# Altium PCB QMKMouse.PcbDoc (part 2 of 2)
Units mm, origin at the board's own origin, x right, y up, seen from the top; angles counter-clockwise.
Board outline 104.61 x 65.75 mm, 4 copper layers (Top Layer, Plane 1, Plane 2, Bottom Layer), stack 0.78 mm thick; 110 components, 56 nets, 360 pads, 326 vias.
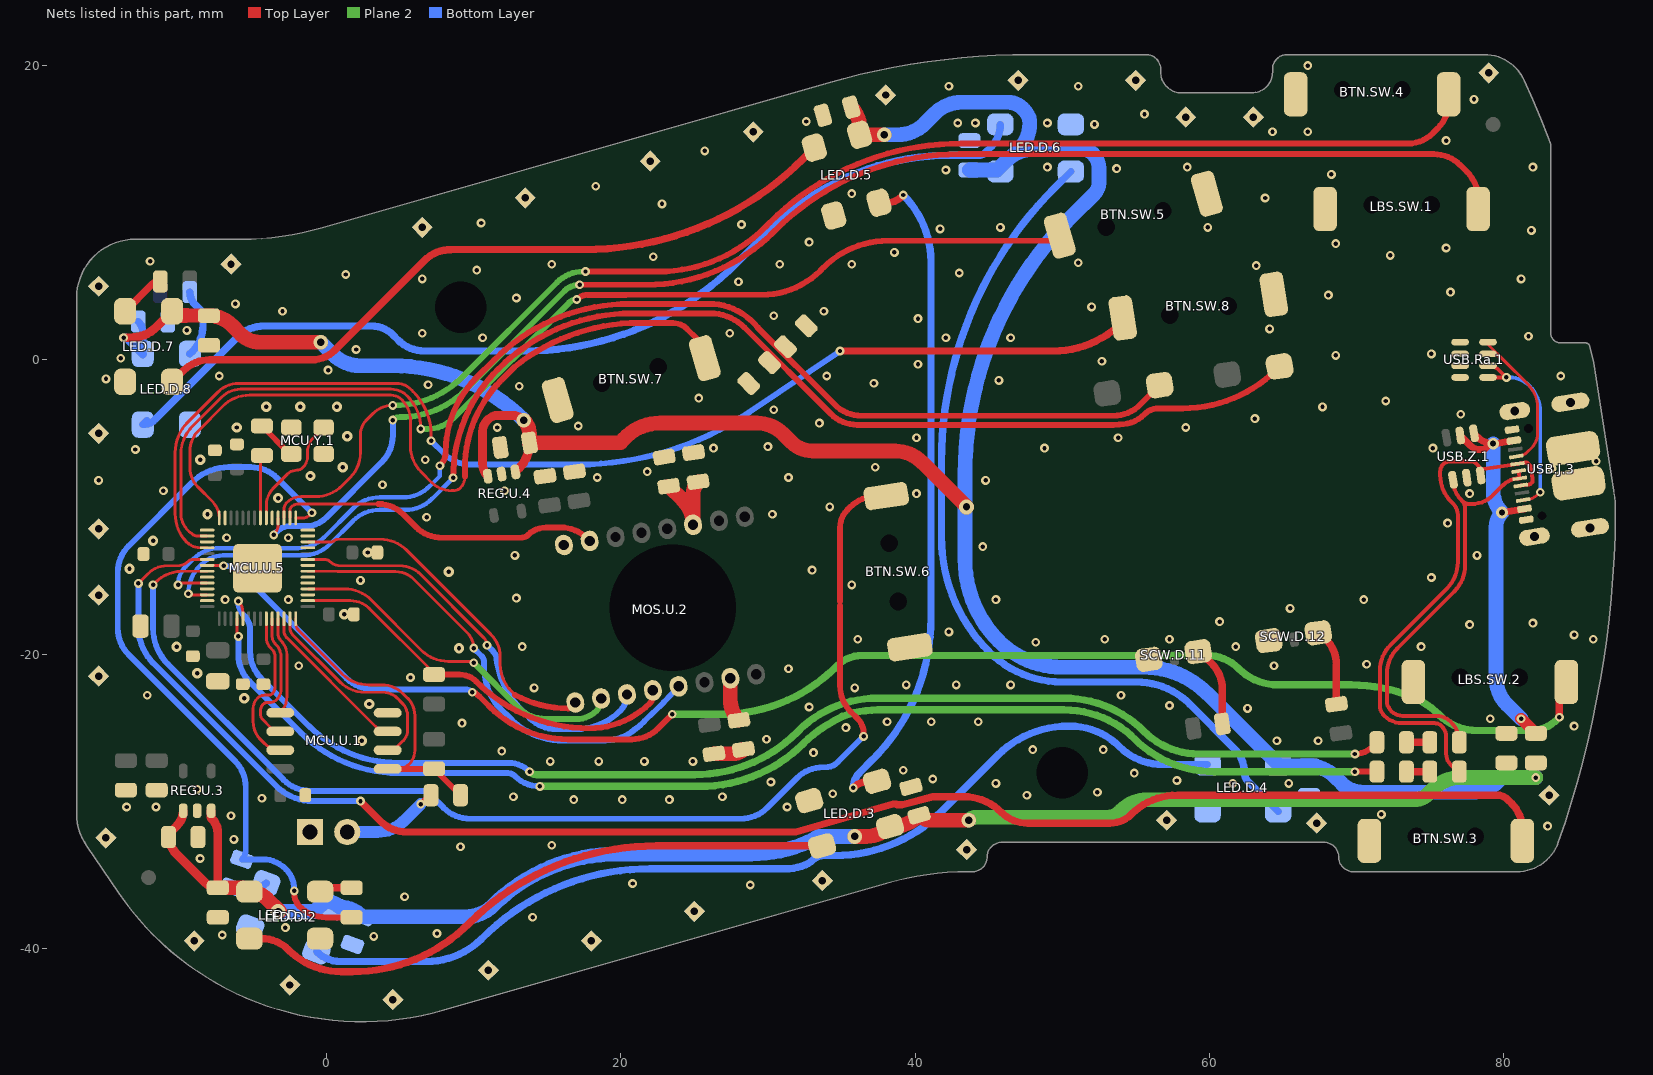
[diagram p4: the nets of this part, all layers, seen from the top]

## Via types
v1: diameter 0.6, hole 0.3, Top Layer to Bottom Layer, tented both sides, 258 vias
v2: diameter 0.7, hole 0.3, Top Layer to Bottom Layer, tented both sides, 29 vias
v3: diameter 1.016, hole 0.508, Top Layer to Bottom Layer, tented both sides, 28 vias
v4: diameter 1, hole 0.5, Top Layer to Bottom Layer, tented both sides, 9 vias
v5: diameter 0.8, hole 0.4, Top Layer to Bottom Layer, tented both sides, 2 vias

## Nets (pads, with @x,y where several pads share a name; then routed paths per layer and width w, separated by ;. In a path a pad name is that pad's centre, name@x,y a point inside that pad or via, vN(x,y) a via of type N, cw(c..) or ccw(c..) an arc to the next point about the centre after c; other vN are vias at no path point) (continued)
GND: BTN.SW.3.B BTN.SW.4.B BTN.SW.5.B BTN.SW.6.B BTN.SW.7.B BTN.SW.8.B LBS.SW.1.B LBS.SW.2.B LED.C.20.1 LED.C.21.1 LED.C.23.1 LED.C.24.1 LED.C.25.1 LED.C.26.1 LED.C.27.1 LED.C.28.1 LED.D.1.3 LED.D.2.3 LED.D.3.3 LED.D.4.3 LED.D.5.3 LED.D.6.3 LED.D.7.3 LED.D.8.3 MCH.SP.1.1 MCH.SP.2.1 MCH.SP.3.1 MCH.SP.4.1 MCH.SP.5.1 MCH.SP.6.1 MCH.SP.7.1 MCH.SP.8.1 MCH.SP.9.1 MCH.SP.10.1 MCH.SP.11.1 MCH.SP.12.1 MCH.SP.13.1 MCH.SP.14.1 MCH.SP.15.1 MCH.SP.16.1 MCH.SP.17.1 MCH.SP.18.1 MCH.SP.19.1 MCH.SP.20.1 MCH.SP.21.1 MCH.SP.22.1 MCH.SP.23.1 MCH.SP.24.1 MCH.SP.25.1 MCH.SP.26.1 MCH.SP.27.1 MCH.SP.28.1 MCU.C.1.1 MCU.C.2.1 MCU.C.3.1 MCU.C.4.1 MCU.C.5.1 MCU.C.6.1 MCU.C.7.1 MCU.C.8.1 MCU.C.9.1 MCU.C.22.1 MCU.C.29.1 MCU.J.1.1 MCU.U.1.4 MCU.U.5.3 MCU.U.5.5 MCU.U.5.6 MCU.U.5.8 MCU.U.5.11 MCU.U.5.13 MCU.U.5.14 MCU.U.5.19 MCU.U.5.27 MCU.U.5.29 MCU.U.5.31 MCU.U.5.37 MCU.U.5.39 MCU.U.5.41 MCU.U.5.57 MCU.Y.1.2 MCU.Y.1.4 MOS.C.10.1 MOS.C.11.1 MOS.U.2.8 REG.C.12.1 REG.C.13.1 REG.C.14.1 REG.C.16.1 REG.C.17.1 REG.C.18.1 REG.U.3.2 REG.U.4.2 SCW.D.11.C SCW.D.12.C SCW.R.2.1 SCW.R.4.1 USB.C.19.1 USB.J.3.1 USB.J.3.12 USB.J.3.SHELL USB.Ra.1.1 USB.Ra.1.2 USB.Ra.1.3 USB.Ra.1.4 USB.Z.1.2
  other v1: 3.2,-39.2 -7.1,-39.1 7.5,-39 -2.8,-38.6 14,-37.9 5.3,-36.5 28.8,-35.7 20.8,-35.6 -8.6,-33.9 9.1,-33.1 15.3,-33 -6.3,-32.6 83,-31.7 -6.5,-31 71.7,-30.9 -13.6,-30.4 -11.6,-30.4 31.3,-30.4 16.8,-29.9 20.1,-29.9 23.3,-29.9 -4.4,-29.8 12.7,-29.7 26.9,-29.7 47.6,-29.6 34.4,-29.5 52.4,-29.4 -8.8,-29.2 45.5,-28.8 61.6,-28.8 65.4,-28.8 30.2,-28.7 57.8,-28.6 41.2,-28.5 54.9,-28.1 39.2,-27.9 15.2,-27.3 18.5,-27.3 21.6,-27.3 24.9,-27.3 33.1,-26.7 11.9,-26.6 48,-26.5 52.8,-26.5 64.6,-25.9 67.4,-25.9 29.9,-25.8 35.3,-25 84.8,-24.9 9.2,-24.7 38.1,-24.6 41.1,-24.6 44.3,-24.6 79.1,-24.4 62.6,-23.7 32.8,-23.6 57.3,-23.5 -12.2,-22.8 54,-22.8 14.1,-22.3 35.9,-22.3 39.4,-22.1 42.8,-22.1 46.5,-22.1 5.7,-21.6 31.4,-21 -1.9,-20.8 64.4,-20.8 70.7,-20.7 13.3,-19.5 61.8,-19.5 74.4,-19.5 48.2,-19.2 36.1,-19 52.9,-19 57.3,-19 86.1,-19 84.8,-18.7 42.3,-18.5 77.7,-18 82,-17.9 60.7,-17.8 65.5,-16.9 -6.9,-16.3 -2.6,-16.3 45.5,-16.3 70.5,-16.3 12.9,-16.2 35.7,-15.3 2.3,-15 75.1,-14.8 33,-14.3 12.8,-13.3 78.2,-13.3 44.6,-12.7 -6.8,-12.1 -2.6,-12.1 76.2,-11.1 6.8,-10.7 30.3,-10.5 34.2,-10 40.1,-9.1 77.7,-9.1 -11.1,-8.9 12.1,-8.9 3.8,-8.5 -15.5,-8.2 44.8,-8.2 18.4,-8 31.4,-8 21.8,-7.6 83.3,-7.4 37.3,-7.3 86.3,-6.9 6.7,-6.8 -13,-6.1 26.3,-6 48.8,-6 75.2,-6 30,-5.9 40.1,-5.3 53.8,-5.3 11.6,-4.6 58.4,-4.6 17.1,-4.5 33.5,-4.3 63.1,-4 77.1,-3.7 30.4,-3.4 67.7,-3.2 72,-2.8 25.3,-2.6 13.1,-1.8 6.9,-1.7 37.2,-1.6 45.7,-1.4 -15,-1.3 -7.3,-1.1 34,-1.1 83.9,-1.1 0.1,-0.7 40.2,-0.3 52.7,-0.1 -14,0.1 68.6,0.3 75.1,0.4 2,0.7 10.6,1.5 42.1,1.5 46.5,1.5 81.7,1.6 6.5,1.8 27.4,1.8 -9.5,2 64.1,2.1 40.2,2.8 30.4,3 -3,3.3 33.8,3.3 52,3.6 -6.2,3.8 12.9,4.2 68.1,4.4 76.4,4.6 28,5.3 6.5,5.5 81.2,5.5 1.3,5.8 43,5.9 10.2,6.1 63.2,6.4 15.3,6.5 30.8,6.5 35.7,6.5 51.1,6.6 -12,6.7 22.2,7 72.3,7.1 38.6,7.3 76.1,7.6 68.6,7.9 32.8,8 81.9,8.8 41.7,8.9 45.8,9 59.9,9 28.2,9.2 10.5,9.3 22.8,10.6 63.8,11 35.7,11.3 18.3,11.8 68.3,12.6 42.1,12.9 53.7,13 49,13.1 58.5,13.1 82,13.1 25.7,14.2 76.1,14.9 64.3,15.5 66.7,15.5 52.2,16 42.9,16.1 44.1,16.1 49,16.1 32.6,16.2 55.6,16.7 78,17.7 42.3,18.6 51.1,18.6 66.7,20
  other v2: 2.4,-25.9 2.9,-23.4 -5.6,-23 -8.8,-21.3 9,-19.6 -10.2,-19.5 1.2,-17.3 8.3,-14.4 -13.4,-14.2 2.8,-13.1 -11.8,-12.3 -8.1,-10.5 -3.3,-9.4 -1.1,-7.9 1.1,-7.3 -8.6,-6.8 1.4,-5.2 -6.1,-4.6 -4.1,-3.2 -1.8,-3.2 0.7,-3.2
  other v3: 4.5,-43.5 -2.5,-42.5 11,-41.5 -9,-39.5 18,-39.5 25,-37.5 33.7,-35.4 43.5,-33.3 -15,-32.5 67.3,-31.5 57.1,-31.3 83.1,-29.6 -15.5,-21.5 -15.5,-16 -15.5,-11.5 -15.5,-5 -15.5,5 -6.5,6.5 6.5,9 13.5,11 22,13.5 29,15.5 58.4,16.5 63,16.5 38,18 47,19 55,19 79,19.5
LEDData: LED.R.16.2 LED.R.17.2 MCU.U.5.15 | length 51.6
  Top Layer w0.2: MCU.U.5.15@-2.1,-10.75 -1.604,-10.75 ccw(c-1.604,-10.138) -1.171,-10.571 v1(-1,-10.4)
  Top Layer w0.4: v1(-2.2,-36.1) -2.2,-36.293 ccw(c-0.976,-36.293) -1.842,-37.158 ccw(c-0.046,-35.362) -0.046,-37.902 LED.R.16.2@1.7,-37.902
  Bottom Layer w0.4: v1(-2.2,-36.1) -2.2,-36 ccw(c-4.131,-36) -2.766,-34.634 -2.8,-34.6 ccw(c-4.35,-36.15) -4.35,-33.958 LED.R.17.2@-5.757,-33.958 ccw(c-6.378,-33.337) -5.5,-33.337 -5.5,-29.052 ccw(c-8.04,-29.052) -6.244,-27.256 -13.456,-20.044 cw(c-11.66,-18.248) -14.2,-18.248 -14.2,-14.452 cw(c-11.66,-14.452) -13.456,-12.656 -9.2,-8.4 cw(c-6.657,-10.789) -6.657,-7.3 -5.152,-7.3 cw(c-5.152,-9.84) -3.356,-8.044 v1(-1,-10.4)
NetBTN.SW.3_A: BTN.SW.3.A MCU.U.5.34 | length 112
  Top Layer w0.2: v1(-12.8,-15.2) -12.122,-14.522 cw(c-10.862,-15.781) -10.862,-14 -10.124,-14 ccw(c-10.124,-12.976) -9.4,-13.7 cw(c-9.098,-14.002) -9.098,-13.575 MCU.U.5.34@-8.125,-13.575
  Top Layer w0.5: v1(2.3,-30) 3.656,-31.356 ccw(c5.452,-29.56) 5.452,-32.1 26.248,-32.1 31.906,-32.1 38.5,-30.2 38.7,-30.2 ccw(c38.827,-30.073) 38.827,-30.253 39.088,-30.253 41.2,-29.7 43.304,-29.7 43.307,-29.7 cw(c43.307,-33.306) 45.855,-30.755 45.858,-30.758 ccw(c47.652,-28.96) 47.652,-31.5 53.251,-31.5 ccw(c53.251,-29.451) 54.698,-30.902 cw(c57.838,-34.038) 57.838,-29.6 79.576,-29.6 cw(c79.576,-30.624) 80.3,-29.9 80.545,-30.145 cw(c78.749,-31.941) 81.289,-31.941 BTN.SW.3.A@81.289,-32.703
  Bottom Layer w0.4: v1(-12.8,-15.2) -12.8,-18.148 ccw(c-9.294,-18.148) -11.773,-20.627 -3.427,-28.973 ccw(c-0.948,-26.494) -0.948,-30 v1(2.3,-30)
NetBTN.SW.4_A: BTN.SW.4.A MCU.U.5.17 | length 91.4
  Top Layer w0.2: MCU.U.5.17@-2.9,-10.75 -2.9,-10.183 cw(c-2.217,-10.183) -2.7,-9.7 cw(c-1.734,-10.666) -1.734,-9.3 -0.752,-9.3 ccw(c-0.752,-6.76) 1.044,-8.556 1.6,-8 ccw(c-0.09,-6.31) 2.3,-6.31 2.3,-5.1 cw(c3.749,-5.1) 2.724,-4.076 3.134,-3.666 cw(c4.5,-5.031) v1(4.5,-3.1)
  Top Layer w0.4: v1(17.6,6) 22.545,6 22.547,6 ccw(c22.547,16.269) 29.809,9.009 30.132,9.332 cw(c43.089,-3.621) 43.089,14.7 73.51,14.7 ccw(c73.51,17.09) 75.2,15.4 75.531,15.731 ccw(c73.735,17.527) 76.275,17.527 BTN.SW.4.A@76.275,17.55
  Plane 2 w0.4: v1(4.5,-3.1) 4.595,-3.1 4.597,-3.1 ccw(c4.597,3.425) 9.212,-1.188 15.656,5.256 cw(c17.452,3.46) 17.452,6 v1(17.6,6)
NetBTN.SW.5_A: BTN.SW.5.A MCU.U.5.30 | length 75.1
  Top Layer w0.2: MCU.U.5.30@-8.125,-11.975 -8.778,-11.975 cw(c-8.778,-11.378) -9.2,-11.8 cw(c-8.245,-10.449) -9.9,-10.448 -9.9,-6.384 cw(c-7.284,-6.384) -9.134,-4.534 -7.134,-2.534 cw(c-5.845,-3.823) -5.845,-2 4.376,-2 cw(c4.376,-3.566) 5.483,-2.459 cw(c3.269,-4.673) 6.4,-4.673 v1(6.4,-4.7)
  Top Layer w0.4: v1(17,4.1) cw(c17.767,3.333) 17.767,4.418 20.347,4.418 20.35,4.42 29.596,4.42 29.598,4.42 ccw(c29.598,10.026) 33.562,6.062 33.769,6.269 cw(c38.164,1.875) 38.164,8.09 44.1,8.09 49.793,8.09 BTN.SW.5.A@49.827,8.124
  Plane 2 w0.4: v1(6.4,-4.7) 6.848,-4.7 ccw(c6.848,-2.16) 8.644,-3.956 16.488,3.888 cw(c17,3.376) v1(17,4.1)
NetBTN.SW.6_A: BTN.SW.6.A MCU.U.5.36 | length 81.7
  Top Layer w0.2: v1(-11.8,-15.3) -11.619,-15.119 cw(c-9.823,-16.915) -11.397,-14.922 cw(c-9.823,-16.915) -10.921,-14.625 cw(c-9.823,-16.915) -10.178,-14.4 -10.124,-14.4 ccw(c-10.124,-12.976) -9.86,-14.375 -9.509,-14.375 -9.2,-14.375 MCU.U.5.36@-8.125,-14.375
  Top Layer w0.4: 34.9,-16.7 34.9,-22.148 ccw(c37.44,-22.148) 35.644,-23.944 36.1,-24.4 cw(c35.134,-25.366) 36.5,-25.366 v1(36.5,-25.6) ; 34.9,-16.414 34.9,-16.051 34.9,-16.049 34.9,-11.407 cw(c36.607,-11.407) 35.4,-10.2 35.59,-10.01 cw(c37.386,-11.806) 37.386,-9.266 BTN.SW.6.A@38.043,-9.266
  Bottom Layer w0.4: v1(-11.8,-15.3) -11.8,-18.248 ccw(c-8.347,-18.248) -10.789,-20.69 -2.922,-28.556 ccw(c-1.126,-26.76) -1.126,-29.3 6.373,-29.3 cw(c6.373,-30.324) 7.098,-29.6 7.954,-30.456 ccw(c9.75,-28.66) 9.75,-31.2 28.148,-31.2 ccw(c28.148,-28.66) 29.944,-30.456 31.956,-28.444 cw(c33.752,-30.24) 33.752,-27.7 33.9,-27.7 ccw(c33.9,-26.493) 34.753,-27.347 v1(36.5,-25.6)
NetBTN.SW.7_A: BTN.SW.7.A MCU.U.5.28 | length 54.3
  Top Layer w0.2: MCU.U.5.28@-7.3,-10.75 ccw(c-8.869,-10.75) -7.76,-9.64 -8.734,-8.666 cw(c-7.369,-7.3) -9.3,-7.3 -9.3,-6.249 cw(c-7.251,-6.249) -8.7,-4.8 -7.044,-3.144 cw(c-5.248,-4.94) -5.248,-2.4 4.376,-2.4 cw(c4.376,-3.424) 5.1,-2.7 cw(c3.651,-4.149) 5.7,-4.149 5.7,-5.848 ccw(c8.24,-5.848) 6.444,-7.644 7.134,-8.334 ccw(c8.5,-6.969) 8.5,-8.9 8.617,-8.9 ccw(c8.617,-8.217) 9.1,-8.7 ccw(c8.376,-7.976) 9.4,-7.976 9.4,-7.932
  Top Layer w0.4: 9.4,-7.932 9.4,-7.363 9.4,-7.361 cw(c17.858,-7.361) 11.877,-1.38 12.788,-0.469 cw(c21.33,-11.19) 20.634,2.5 23.534,2.5 cw(c23.534,1.134) 24.5,2.1 25.156,1.444 cw(c23.822,0.11) 25.673,0.476 cw(c23.822,0.11) BTN.SW.7.A@25.708,0.11
NetBTN.SW.8_A: BTN.SW.8.A MCU.U.5.32 | length 80.3
  Top Layer w0.2: MCU.U.5.32@-8.125,-12.775 -8.595,-12.775 cw(c-8.595,-11.495) -9.5,-12.4 cw(c-7.569,-10.469) -10.3,-10.469 -10.3,-6.307 cw(c-7.386,-6.307) -9.446,-4.246 -7.404,-2.204 cw(c-5.945,-3.664) -5.945,-1.6 4.727,-1.6 cw(c4.727,-3.047) 5.9,-2.2 cw(c3.003,-5.097) 7.1,-5.097 v1(7.1,-5.5)
  Top Layer w0.5: v1(34.9,0.6) 49.399,0.6 49.401,0.6 ccw(c49.401,7.194) BTN.SW.8.A@54.064,2.531
  Bottom Layer w0.4: v1(7.1,-5.5) 7.976,-6.376 ccw(c9.772,-4.58) 9.772,-7.12 12.8,-7.12 17.115,-7.12 ccw(c17.115,13.602) 20.194,-6.89 ccw(c17.115,13.602) 24.553,-5.739 ccw(c17.115,13.602) 28.701,-3.578 v1(34.9,0.6)
NetLBS.SW.1_A: LBS.SW.1.A MCU.U.5.18 | length 95.5
  Top Layer w0.2: v1(-3.6,-11.9) ccw(c-4.324,-11.176) -3.3,-11.176 MCU.U.5.18@-3.3,-10.75
  Top Layer w0.4: v1(17.2,5.1) 21.765,5.1 21.767,5.1 ccw(c21.767,17.252) 30.36,8.66 30.505,8.805 cw(c42.996,-3.683) 42.996,13.98 75.268,13.98 cw(c75.268,11.44) 77.064,13.236 77.531,12.769 cw(c75.735,10.973) 78.275,10.973 LBS.SW.1.A@78.275,10.25
  Plane 2 w0.4: v1(4.5,-4.1) cw(c4.983,-4.583) 4.98,-3.9 4.989,-3.9 ccw(c4.983,2.418) 9.452,-2.048 16.176,4.676 cw(c17.2,3.651) v1(17.2,5.1)
  Bottom Layer w0.4: v1(-3.6,-11.9) -3.354,-11.654 cw(c-2.5,-12.507) -2.5,-11.3 -1.4,-11.3 ccw(c-1.4,-9.369) -0.034,-10.734 3.756,-6.944 ccw(c1.96,-5.148) 4.5,-5.148 v1(4.5,-4.1)
NetLBS.SW.2_A: LBS.SW.2.A MCU.U.5.35 | length 102.4
  Top Layer w0.2: MCU.U.5.35@-8.125,-13.975 -7.06,-13.975 cw(c-7.06,-14.06) v1(-7,-14)
  Top Layer w0.4: v1(9.9,-22.6) cw(c9.9,-23.083) 10.124,-22.655 ccw(c17.855,-14.173) 10.391,-22.891 10.997,-23.497 11.09,-23.59 ccw(c16.425,-18.256) 16.425,-25.8 16.427,-25.8 20.748,-25.8 ccw(c20.748,-23.26) 22.544,-25.056 v1(23.5,-24.1)
  Top Layer w0.5: v1(83.8,-24.3) 83.8,-22.175 LBS.SW.2.A@84.375,-21.6
  Plane 2 w0.5: v1(23.5,-24.1) 26.821,-24.1 26.823,-24.1 ccw(c26.823,-13.051) 34.638,-20.862 34.7,-20.8 cw(c36.39,-22.49) 36.39,-20.1 59.864,-20.1 59.866,-20.1 cw(c59.866,-23.08) 61.972,-20.972 61.975,-20.975 ccw(c64.694,-18.251) 64.694,-22.1 64.696,-22.1 69.651,-22.1 69.653,-22.1 cw(c69.653,-32.988) 73.82,-22.929 cw(c71.677,-28.103) 75.638,-24.145 ccw(c78.189,-21.591) 78.189,-25.2 78.191,-25.2 81.848,-25.2 ccw(c81.848,-22.66) 83.644,-24.456 v1(83.8,-24.3)
  Bottom Layer w0.4: v1(-7,-14) cw(c-7,-15.69) -5.805,-14.495 1.356,-21.656 ccw(c3.152,-19.86) 3.152,-22.4 9.417,-22.4 cw(c9.417,-23.083) v1(9.9,-22.6)
NetLED.D.1_2: LED.D.1.2 LED.D.3.4 | length 41.8
  Top Layer w0.5: LED.D.1.2@-5.25,-39.35 -4.402,-39.35 cw(c-4.402,-41.89) -2.606,-40.094 -2.58,-40.12 -2.578,-40.122 ccw(c0.99,-36.555) 0.99,-41.6 0.992,-41.6 1.742,-41.6 1.745,-41.6 ccw(c1.745,-30.361) 9.693,-38.307 9.698,-38.302 cw(c22.385,-50.987) 22.385,-33.046 LED.D.3.4@33.679,-33.046
NetLED.D.1_4: LED.D.1.4 LED.R.16.1 | length 2.2
  Top Layer w0.5: LED.D.1.4@-0.45,-36.15 cw(c0.159,-36.759) 0.159,-35.898 LED.R.16.1@1.7,-35.898
NetLED.D.2_2: LED.D.2.2 LED.D.4.4 | length 66.3
  Bottom Layer w0.5: LED.D.2.2@-0.692,-40.224 ccw(c0.939,-38.593) 0.939,-40.9 6.794,-40.9 6.796,-40.9 ccw(c6.796,-35.58) 10.56,-39.34 10.595,-39.305 cw(c21.952,-50.659) 21.952,-34.6 31.173,-34.6 31.175,-34.6 ccw(c31.175,-30.917) 32.585,-34.32 ccw(c32.058,-33.049) 33.031,-34.021 33.033,-34.019 cw(c33.807,-34.797) 33.807,-33.7 34.552,-33.7 34.554,-33.7 ccw(c34.554,-23.449) 41.804,-30.696 45.594,-26.906 cw(c50.435,-31.744) 50.435,-24.9 50.514,-24.9 50.516,-24.9 cw(c50.516,-29.689) 53.9,-26.3 53.902,-26.302 ccw(c56.813,-23.391) 56.813,-27.508 56.815,-27.508 LED.D.4.4@59.885,-27.508
NetLED.D.2_4: LED.D.2.4 LED.R.17.1 | length 2.4
  Bottom Layer w0.5: LED.R.17.1@-6.443,-35.842 -4.751,-35.842 ccw(c-4.751,-34.933) LED.D.2.4@-4.108,-35.576
NetLED.D.3_2: LED.D.3.2 LED.D.5.4 | length 45.9
  Top Layer w0.5: v1(35.8,-29.1) cw(c36.876,-30.176) 36.876,-28.654 LED.D.3.2@37.42,-28.654 ; LED.D.5.4@37.546,10.68 38.086,10.68 ccw(c38.086,12.114) 39.1,11.1 v1(39.2,11.2)
  Bottom Layer w0.5: v1(35.8,-29.1) cw(c37.249,-29.1) 36.224,-28.076 37.1,-27.2 ccw(c27.491,-17.591) 41.08,-17.591 41.08,6.659 41.08,6.661 ccw(c34.661,6.661) v1(39.2,11.2)
NetLED.D.4_2: LED.D.4.2 LED.D.6.4 | length 60.3
  Bottom Layer w0.5: LED.D.6.4@50.6,12.8 49.521,11.721 ccw(c68.157,-6.917) 41.8,-6.917 41.8,-6.92 41.8,-12.047 41.8,-12.05 ccw(c52.829,-12.05) 45.031,-19.849 ccw(c49.983,-14.896) 49.983,-21.9 55.037,-21.9 55.039,-21.9 cw(c55.039,-27.058) 58.686,-23.41 58.688,-23.412 61.71,-26.434 cw(c60.044,-28.1) 62.4,-28.1 ccw(c63.178,-28.1) 62.628,-28.65 LED.D.4.2@64.685,-30.708
NetLED.D.5_2: LED.D.5.2 LED.D.7.4 | length 50.1
  Top Layer w0.5: LED.D.7.4@-10.5,-1.5 -9.744,-0.744 cw(c-7.948,-2.54) -7.948,0 -1.015,0 ccw(c-1.015,2.215) 0.551,0.648 ; 0.551,0.649 6.658,6.756 cw(c8.454,4.96) 7.694,7.383 ; LED.D.5.2@33.154,14.42 32.395,13.662 cw(c17.522,28.532) 17.522,7.5 17.519,7.5 8.801,7.5 ; 7.694,7.383 cw(c8.454,4.96) 8.454,7.5 8.801,7.5 ; 7.694,7.383 cw(c8.801,2.187) 8.801,7.5
NetLED.D.6_2: LED.D.6.2 LED.D.8.4 | length 67
  Bottom Layer w0.5: LED.D.8.4@-12.235,-4.135 LED.D.8.4@-12.5,-4.4 ccw(c-12.5,-3.193) -11.646,-4.046 -6.044,1.556 cw(c-4.248,-0.24) -4.248,2.3 3.051,2.3 cw(c3.051,0.251) 4.5,1.7 4.856,1.344 ccw(c6.652,3.14) 6.652,0.6 13.492,0.6 13.494,0.6 ccw(c13.494,20.894) 27.845,6.545 30.123,8.823 cw(c42.375,-3.423) 42.375,13.9 42.378,13.9 44.317,13.9 ccw(c44.317,14.583) 44.8,14.1 45.164,14.464 ccw(c43.627,16) LED.D.6.2@45.8,16
NetLED.D.7_2: LED.D.7.2 LED.R.18.2 | length 3.2
  Top Layer w0.5: LED.D.7.2@-13.7,3.3 -11.938,5.062 cw(c-11.302,4.425) LED.R.18.2@-11.302,5.325
NetLED.D.8_2: LED.D.8.2 LED.R.19.2 | length 4.8
  Bottom Layer w0.5: LED.D.8.2@-9.3,0.4 -9.144,0.556 ccw(c-10.94,2.352) -8.4,2.352 -8.4,2.917 ccw(c-9.083,2.917) -8.6,3.4 -8.942,3.742 ; LED.R.19.2@-9.298,4.6 ccw(c-8.085,4.6) -8.943,3.743
NetMCU.J.1_2: MCU.J.1.2 MCU.R.8.1 | length 6.6
  Top Layer w0.4: v1(6.4,-30.2) 7,-29.6 MCU.R.8.1@7.098,-29.6
  Bottom Layer w0.8: MCU.J.1.2@1.4,-32.1 3.448,-32.1 ccw(c3.448,-29.56) 5.244,-31.356 v1(6.4,-30.2)
NetMCU.R.8_2: MCU.R.8.2 MCU.R.9.2 MCU.U.1.1 MCU.U.5.56 | length 21.2
  Top Layer w0.2: MCU.U.5.56@-2.1,-17.6 -2.1,-17.917 ccw(c-1.417,-17.917) -1.9,-18.4 1.056,-21.356 ccw(c2.852,-19.56) 2.852,-22.1 3.751,-22.1 cw(c3.751,-24.149) 5.2,-22.7 5.505,-23.005 cw(c4.31,-24.2) 6,-24.2 6,-26.534 cw(c4.634,-26.534) 5.6,-27.5 cw(c4.864,-26.764) MCU.U.1.1@4.864,-27.805
  Top Layer w0.4: MCU.U.1.1@4.15,-27.805 4.864,-27.805 7.297,-27.805 MCU.R.9.2@7.3,-27.802 7.305,-27.802 MCU.R.8.2@9.102,-29.6
NetMCU.R.10_1: MCU.R.10.1 MCU.U.5.21 | length 4.3
  Top Layer w0.2: MCU.U.5.21@-4.5,-10.75 -4.5,-6.744 cw(c-4.159,-6.744) MCU.R.10.1@-4.4,-6.502
NetMCU.R.10_2: MCU.R.10.2 MCU.Y.1.3 | length 2.8
  Top Layer w0.4: MCU.R.10.2@-4.4,-4.498 -2.567,-6.331 ccw(c-2.4,-6.164) MCU.Y.1.3@-2.4,-6.4
NetMCU.U.1_2: MCU.U.1.2 MCU.U.5.55 | length 14.4
  Top Layer w0.2: MCU.U.5.55@-2.5,-17.6 -2.5,-18.217 ccw(c-1.817,-18.217) -2.3,-18.7 0.893,-21.893 ccw(c2.6,-20.186) 2.6,-22.6 3.834,-22.6 cw(c3.834,-23.966) 4.8,-23 5.146,-23.346 cw(c4.293,-24.2) 5.5,-24.2 5.5,-25.176 cw(c4.476,-25.176) 5.2,-25.9 4.858,-26.242 cw(c4.15,-25.533) MCU.U.1.2@4.15,-26.535
NetMCU.U.1_3: MCU.U.1.3 MCU.U.5.54 | length 10.8
  Top Layer w0.2: MCU.U.5.54@-2.9,-17.6 -2.9,-18.417 ccw(c-2.217,-18.417) -2.7,-18.9 3.322,-24.922 ccw(c4.15,-24.094) MCU.U.1.3@4.15,-25.265
NetMCU.U.1_5: MCU.U.1.5 MCU.U.5.53 | length 6.7
  Top Layer w0.2: MCU.U.5.53@-3.3,-17.6 -3.3,-18.617 ccw(c-2.617,-18.617) -3.1,-19.1 cw(c-4.066,-20.066) -2.7,-20.066 -2.7,-22.909 cw(c-4.236,-22.909) MCU.U.1.5@-3.15,-23.995
NetMCU.U.1_6: MCU.U.1.6 MCU.U.5.52 | length 9.4
  Top Layer w0.2: MCU.U.5.52@-3.7,-17.6 -3.7,-18.817 ccw(c-3.017,-18.817) -3.5,-19.3 -3.454,-19.346 ; -3.453,-19.347 cw(c-4.307,-20.2) -3.1,-20.2 -3.1,-22.376 cw(c-4.124,-22.376) -3.4,-23.1 cw(c-3.883,-22.617) -3.883,-23.3 -4.059,-23.3 ccw(c-4.059,-23.641) -4.3,-23.4 ccw(c-3.817,-23.883) -4.5,-23.883 -4.5,-24.1 ccw(c-4.017,-24.1) -4.359,-24.441 -3.807,-24.993 ccw(c-3.15,-24.336) MCU.U.1.6@-3.15,-25.265
NetMCU.U.1_7: MCU.U.1.7 MCU.U.5.51 | length 11
  Top Layer w0.2: MCU.U.5.51@-4.1,-17.6 -4.1,-18.876 ccw(c-3.076,-18.876) -3.8,-19.6 -3.712,-19.688 cw(c-4.224,-20.2) -3.5,-20.2 -3.5,-22.217 cw(c-4.183,-22.217) -3.7,-22.7 cw(c-3.941,-22.459) -3.941,-22.8 -4.217,-22.8 ccw(c-4.217,-23.483) -4.7,-23 ccw(c-3.976,-23.724) -5,-23.724 -5,-24.6 ccw(c-3.31,-24.6) -4.505,-25.795 -4.2,-26.1 ccw(c-3.15,-25.05) MCU.U.1.7@-3.15,-26.535
NetMCU.U.5_2: MCU.U.5.2 MOS.R.5.1 MOS.U.2.12 | length 27.7
  Top Layer w0.2: MCU.U.5.2@-1.275,-16.375 1.633,-16.375 cw(c1.633,-18.167) 2.9,-16.9 7.231,-21.231 cw(c7.064,-21.398) MOS.R.5.1@7.3,-21.398
  Top Layer w0.4: MOS.R.5.1@7.3,-21.398 9.04,-21.398 cw(c9.04,-22.985) 10.162,-21.862 10.164,-21.864 ccw(c17.855,-14.173) 17.856,-25.05 ccw(c17.855,-19.215) 21.98,-23.341 ; 21.981,-23.34 ccw(c21.514,-22.875) 22.173,-22.875 MOS.U.2.12@22.173,-22.474
NetMCU.U.5_4: MCU.U.5.4 MOS.U.2.10 | length 24
  Top Layer w0.2: MCU.U.5.4@-1.275,-15.575 1.223,-15.575 cw(c1.223,-18.115) 3.019,-16.319 6.456,-19.756 ccw(c8.252,-17.96) 8.252,-20.5 9.759,-20.5 cw(c9.759,-20.841) 10,-20.6 v1(9.999,-20.6)
  Plane 2 w0.4: v1(9.999,-20.6) 13.063,-23.664 ccw(c14.859,-21.868) 14.859,-24.408 16.352,-24.408 16.904,-24.416 ccw(c16.937,-22.194) 16.978,-24.416 16.984,-24.416 ccw(c17.011,-22.539) 18.34,-23.865 ccw(c17.561,-23.089) 18.66,-23.089 MOS.U.2.10@18.66,-23.023
NetMCU.U.5_7: MCU.U.5.7 MOS.U.2.13 | length 32.5
  Top Layer w0.2: MCU.U.5.7@-1.275,-14.375 0.659,-14.375 ccw(c0.924,-12.976) 0.793,-14.394 ; 0.793,-14.394 ccw(c0.924,-12.976) 0.924,-14.4 4.693,-14.4 cw(c4.693,-16.107) 5.9,-14.9 9.576,-18.576 cw(c8.551,-19.6) v1(10,-19.6)
  Bottom Layer w0.4: v1(10,-19.6) 10.53,-20.13 cw(c10.122,-20.538) 10.699,-20.538 10.699,-20.777 ccw(c15.466,-20.777) 11.062,-22.602 ccw(c14.15,-21.322) 11.788,-23.688 12.511,-24.411 ccw(c16.104,-20.821) 16.104,-25.9 18.637,-25.9 ccw(c18.637,-21.659) 20.406,-25.513 ccw(c16.941,-19.923) 21.605,-24.56 21.608,-24.558 22.898,-23.306 ccw(c22.189,-22.572) 22.935,-23.267 MOS.U.2.13@23.93,-22.199
NetMCU.U.5_9: MCU.U.5.9 MOS.U.2.11 | length 28.6
  Top Layer w0.2: MCU.U.5.9@-1.275,-13.575 -0.102,-13.575 cw(c-0.102,-14.002) 0.2,-13.7 ccw(c0.924,-12.976) 0.924,-14 4.951,-14 cw(c4.951,-16.049) 6.4,-14.6 10.688,-18.888 cw(c10.176,-19.4) v1(10.9,-19.4)
  Bottom Layer w0.4: v1(10.9,-19.4) 11.318,-19.818 cw(c10.743,-20.392) 11.532,-20.199 ; 11.556,-20.392 ccw(c10.743,-20.392) 11.532,-20.199 ; 16.981,-25.1 15.594,-25.1 cw(c15.594,-22.56) 13.798,-24.356 13.405,-23.963 13.255,-23.813 13.254,-23.812 cw(c17.488,-19.578) 11.532,-20.199 ; 16.982,-25.1 ccw(c16.982,-20.897) 19.954,-23.87 ; 19.954,-23.869 ccw(c18.828,-22.748) MOS.U.2.11@20.417,-22.748
NetMCU.U.5_12: MCU.U.5.12 MOS.U.2.9 | length 24.1
  Top Layer w0.2: MCU.U.5.12@-1.275,-12.375 0.319,-12.375 ccw(c0.319,-12.119) 0.5,-12.3 cw(c0.741,-12.541) 0.741,-12.2 3.648,-12.2 cw(c3.648,-14.74) 5.444,-12.944 11.164,-18.664 cw(c9.627,-20.2) 11.8,-20.2 11.8,-20.718 ccw(c14.34,-20.718) 12.544,-22.514 12.811,-22.78
  Top Layer w0.4: 12.811,-22.78 ccw(c16.41,-16.189) 16.41,-23.699 ccw(c16.41,-23.476) 16.568,-23.634 MOS.U.2.9@16.903,-23.298
NetMCU.U.5_16: MCU.U.5.16 MOS.U.2.7 | length 22.3
  Top Layer w0.2: MCU.U.5.16@-2.5,-10.75 -2.5,-10.241 cw(c-2.159,-10.241) -2.4,-10 cw(c-1.917,-10.483) -1.917,-9.8 3.51,-9.8 ; 13.7,-11.9 13.705,-11.895 ; MOS.U.2.7@17.715,-12.144 MOS.U.2.7@17.885,-12.314
  Top Layer w0.4: 3.51,-9.8 cw(c3.51,-12.19) 5.2,-10.5 6.056,-11.356 ccw(c7.852,-9.56) 7.852,-12.1 13.217,-12.1 ccw(c13.217,-11.417) 13.7,-11.9 ; 13.705,-11.895 cw(c14.9,-13.09) 14.9,-11.4 15.919,-11.4 cw(c15.919,-13.94) MOS.U.2.7@17.715,-12.144
NetMCU.U.5_20: MCU.U.5.20 MCU.Y.1.1 | length 7.9
  Top Layer w0.2: MCU.U.5.20@-4.1,-10.75 -4.1,-9.907 cw(c-2.393,-9.907) -3.6,-8.7 -2.683,-7.783 cw(c-2,-8.466) -2,-7.5 ccw(c-2,-7.017) -1.659,-7.359 -1.6,-7.3 ccw(c-2.324,-6.576) -1.3,-6.576 -1.3,-6.3 cw(c0.149,-6.3) -0.876,-5.276 MCU.Y.1.1@-0.2,-4.6
NetMCU.U.5_38: MCU.U.5.38 SCW.Qt.1.E SCW.R.2.2 | length 81.7
  Top Layer w0.2: v1(-10.1,-15.3) -9.975,-15.175 MCU.U.5.38@-8.125,-15.175
  Top Layer w0.4: v1(7.7,-7.2) ccw(c6.734,-6.234) 8.1,-6.234 cw(c15.184,-6.234) 10.175,-1.225 11.376,-0.024 cw(c20.607,-9.253) 20.607,3.8 26.307,3.8 26.326,3.8 cw(c25.939,-0.482) 29.298,2.202 29.314,2.186 34.556,-3.056 ccw(c36.352,-1.26) 36.352,-3.8 53.5,-3.8 ccw(c53.5,-1.26) 55.296,-3.056 SCW.Qt.1.E@56.631,-1.722
  Bottom Layer w0.3: v1(-10.1,-15.3) cw(c-8.354,-15.3) -9.589,-14.065 -9.067,-13.544 cw(c-7.271,-15.34) -7.271,-12.8 -1.925,-12.8 ccw(c-1.925,-10.325) -0.175,-12.075 1.806,-10.094 cw(c3.602,-11.89) 3.602,-9.35 5.198,-9.35 ccw(c5.198,-6.81) 6.994,-8.606 7.7,-7.9 v1(7.7,-7.2)
NetMCU.U.5_40: MCU.U.5.40 SCW.Qt.2.E SCW.R.4.2 | length 89
  Top Layer w0.2: v1(-9.4,-15.9) ccw(c-9.219,-15.719) -9.219,-15.975 MCU.U.5.40@-8.125,-15.975
  Top Layer w0.4: v1(8.6,-8.015) 8.6,-8.013 cw(c19.014,-8.013) 9.599,-3.563 cw(c17.997,-7.361) 11.044,-1.31 ccw(c10.743,-1.047) 11.049,-1.305 cw(c19.014,-8.013) 11.651,-0.649 11.71,-0.59 cw(c20.739,-9.618) 20.739,3.151 26.091,3.151 26.093,3.151 cw(c26.093,-0.123) 28.408,2.192 28.41,2.19 34.276,-3.676 ccw(c36.072,-1.88) 36.072,-4.42 53.5,-4.42 ccw(c53.5,-1.26) 53.721,-4.412 53.881,-4.401 cw(c53.91,-4.8) 53.91,-4.4 ccw(c53.91,-2.01) 55.6,-3.7 cw(c56.566,-4.666) 56.566,-3.3 58.196,-3.3 58.198,-3.3 ccw(c58.199,5.702) 64.565,-0.662 SCW.Qt.2.E@64.781,-0.447
  Bottom Layer w0.3: v1(-9.4,-15.9) -9.4,-15.852 cw(c-6.86,-15.852) -8.656,-14.056 -8.5,-13.9 cw(c-7.051,-15.349) -7.051,-13.3 -1.604,-13.3 ccw(c-1.604,-10.76) 0.192,-12.556 1.805,-10.944 cw(c3.601,-12.74) 3.601,-10.2 5.363,-10.2 ccw(c5.363,-7.66) 7.159,-9.456 v1(8.6,-8.015)
NetMCU.U.5_46: MCU.U.5.46 USB.R.6.2 | length 86.1
  Top Layer w0.2: MCU.U.5.46@-6.1,-17.6 -6.1,-18.559 ccw(c-5.759,-18.559) v1(-6,-18.8)
  Top Layer w0.4: v1(69.9,-28) USB.R.6.2@71.398,-28
  Plane 2 w0.5: v1(14.5,-29) 25.346,-29 25.348,-29 ccw(c25.348,-18.976) 32.437,-26.063 32.456,-26.044 cw(c38.189,-31.777) 34.066,-24.796 cw(c46.353,-45.602) 35.041,-24.25 cw(c46.353,-45.602) 35.07,-24.235 cw(c37.473,-30.661) 37.473,-23.8 50.127,-23.8 cw(c50.127,-30.661) 54.353,-25.256 ; 54.353,-25.256 54.36,-25.263 cw(c48.748,-31.88) 54.882,-25.743 ccw(c60.329,-20.298) 60.329,-28 60.331,-28 v1(69.9,-28)
  Bottom Layer w0.4: v1(-6,-18.8) -6,-20.048 ccw(c-3.46,-20.048) -5.256,-21.844 -1.738,-25.362 ccw(c4.873,-18.75) 4.873,-28.1 12.317,-28.1 cw(c12.317,-28.783) 12.8,-28.3 ccw(c14.49,-26.61) 14.49,-29 v1(14.5,-29)
NetMCU.U.5_47: MCU.U.5.47 USB.R.7.2 | length 87.7
  Top Layer w0.2: v1(-6,-16.4) cw(c-6.724,-17.124) -5.7,-17.124 MCU.U.5.47@-5.7,-17.6
  Top Layer w0.4: v1(69.9,-26.8) ccw(c69.9,-25.116) 71.091,-26.307 USB.R.7.2@71.398,-26
  Plane 2 w0.5: v1(13.8,-28) ccw(c14.283,-27.517) 14.283,-28.2 15.237,-28.2 15.239,-28.2 25.018,-28.2 25.021,-28.2 ccw(c25.021,-18.351) 31.986,-25.314 32.056,-25.244 cw(c37.473,-30.661) 37.473,-23 50.127,-23 cw(c50.127,-30.661) 55.544,-25.244 ccw(c59.301,-21.487) 59.301,-26.8 59.303,-26.8 v1(69.9,-26.8)
  Bottom Layer w0.4: v1(-6,-16.4) -6,-16.434 ccw(c-4.634,-16.434) -5.6,-17.4 cw(c-6.566,-18.366) -5.2,-18.366 -5.2,-19.848 ccw(c-2.66,-19.848) -4.456,-21.644 -1.209,-24.891 ccw(c4.849,-18.833) 4.849,-27.4 12.351,-27.4 cw(c12.351,-29.449) v1(13.8,-28)
NetMOS.C.10_2: MOS.C.10.2 MOS.C.11.2 MOS.U.2.3 | length 6.2
  Top Layer w1: MOS.C.10.2@23.255,-8.59 24.228,-9.563 cw(c22.575,-11.215) MOS.U.2.3@24.912,-11.215 24.912,-9.118 cw(c26.083,-9.118) MOS.C.11.2@25.255,-8.29
NetMOS.R.3_1: MOS.R.3.1 MOS.R.4.2 | length 2.1
  Top Layer w1: MOS.R.3.1@26.332,-26.784 27.608,-26.784 ccw(c27.608,-25.76) MOS.R.4.2@28.332,-26.484
NetMOS.R.4_1: MOS.R.4.1 MOS.U.2.15 | length 3
  Top Layer w1: MOS.U.2.15@27.443,-21.65 27.443,-23.106 ccw(c29.42,-23.106) MOS.R.4.1@28.022,-24.504
NetSCW.D.11_A: SCW.D.11.A SCW.R.1.1 | length 5.4
  Top Layer w0.5: SCW.D.11.A@59.356,-19.822 60.146,-20.612 cw(c58.35,-22.408) 60.89,-22.408 SCW.R.1.1@60.89,-24.745
NetSCW.D.12_A: SCW.D.12.A SCW.R.3.1 | length 5.2
  Top Layer w0.5: SCW.D.12.A@67.506,-18.547 67.901,-18.942 cw(c66.105,-20.738) 68.645,-20.738 SCW.R.3.1@68.645,-23.41
NetUSB.FB.1_1: USB.FB.1.1 USB.J.3.2 USB.J.3.11 USB.Z.1.4 USB.Z.1.5 | length 28.2
  Top Layer w0.48: USB.Z.1.5@77.061,-5.147 77.742,-5.828 ccw(c78.4,-5.17) 78.4,-6.1 78.7,-6.1 79.042,-5.758 79.303,-5.716 USB.J.3.11@80.705,-5.488 ; USB.Z.1.4@78,-5 78.276,-5.276 ccw(c79.3,-4.251) v5(79.3,-5.7) ; v5(79.897,-10.382) USB.J.3.2@81.431,-10.132
  Top Layer w0.8: v1(81.2,-24.4) 81.202,-24.4 USB.FB.1.1@82.2,-25.398
  Bottom Layer w1: v5(79.3,-5.7) 79.3,-8.941 ccw(c81.339,-8.941) v5(79.897,-10.382) ccw(c80.856,-11.341) 79.5,-11.341 79.5,-21.648 ccw(c82.04,-21.648) 80.244,-23.444 v1(81.2,-24.4)
NetUSB.FB.2_1: USB.FB.2.1 USB.J.3.5 USB.J.3.8 USB.Z.1.3 | length 36
  Top Layer w0.27: USB.FB.2.1@77.002,-28 cw(c77.002,-27.753) 76.828,-27.928 76.4,-27.5 cw(c77.124,-26.776) 76.1,-26.776 76.1,-25.624 ccw(c75.076,-25.624) 75.8,-24.9 ccw(c75.317,-25.383) 75.317,-24.7 73.107,-24.7 cw(c73.107,-22.993) 71.9,-24.2 cw(c72.624,-23.476) 71.6,-23.476 71.6,-21.152 cw(c74.14,-21.152) 72.344,-19.356 76.156,-15.544 ccw(c74.36,-13.748) 76.9,-13.748 76.9,-10.524 ccw(c75.876,-10.524) 76.6,-9.8 76.444,-9.644 cw(c78.24,-7.848) 75.7,-7.848 75.7,-7.583 cw(c76.383,-7.583) 75.9,-7.1 cw(c76.383,-7.583) 76.383,-6.9 77.8,-6.9 cw(c77.8,-7.383) 78.141,-7.041 78.2,-7.1 cw(c77.601,-7.699) USB.Z.1.3@78.413,-7.459 ; USB.Z.1.3@78.448,-7.865 78.448,-7.699 ccw(c77.601,-7.699) USB.Z.1.3@78.413,-7.459 ; USB.J.3.5@81.184,-8.551 81.736,-8.463 81.823,-8.449 81.962,-8.309 81.971,-8.243 81.971,-8.049 81.85,-7.275 81.84,-7.21 81.633,-7.003 81.563,-6.988 81.468,-6.988 81.447,-6.991 USB.J.3.8@80.952,-7.069 USB.Z.1.3@78.413,-7.459
NetUSB.FB.2_2: USB.FB.2.2 USB.R.6.1 | length 1.6
  Top Layer w0.5: USB.R.6.1@73.402,-28 USB.FB.2.2@74.998,-28
NetUSB.FB.3_1: USB.FB.3.1 USB.J.3.6 USB.J.3.7 USB.Z.1.1 | length 28.9
  Top Layer w0.27: USB.Z.1.1@76.571,-8.159 ccw(c78.531,-8.159) 77.145,-9.545 77.188,-9.588 ; USB.FB.3.1@77.002,-26 ccw(c75.077,-26) 76.438,-24.638 76.4,-24.6 ccw(c75.434,-25.566) 75.434,-24.2 73.124,-24.2 cw(c73.124,-23.176) 72.4,-23.9 cw(c73.366,-22.934) 72.07,-23.366 72.07,-21.382 cw(c74.61,-21.382) 72.814,-19.586 76.656,-15.744 ccw(c74.86,-13.948) 77.4,-13.948 77.4,-10.1 ccw(c76.676,-10.1) 77.188,-9.588 ; USB.J.3.7@81.029,-7.563 USB.J.3.6@81.107,-8.057 ccw(c81.107,-9.659) 79.974,-8.526 79.3,-9.2 cw(c77.851,-7.751) 77.851,-9.8 77.7,-9.8 cw(c77.7,-9.076) 77.188,-9.588
NetUSB.FB.3_2: USB.FB.3.2 USB.R.7.1 | length 1.6
  Top Layer w0.5: USB.R.7.1@73.402,-26 USB.FB.3.2@74.998,-26
NetUSB.J.3_3: USB.J.3.3 USB.Ra.1.5 USB.Ra.1.6 | length 13.3
  Top Layer w0.2: USB.J.3.3@81.338,-9.539 ccw(c81.338,-8.036) 82.401,-9.099 v1(82.5,-9)
  Top Layer w0.26: USB.Ra.1.5@78.95,-1.2 v1(80.2,-1.2) 79.718,-0.718 ccw(c78.95,-1.486) USB.Ra.1.6@78.95,-0.4
  Bottom Layer w0.26: v1(80.2,-1.2) 80.414,-1.2 cw(c80.414,-3.098) 81.756,-1.756 cw(c79.96,-3.552) 82.5,-3.552 v1(82.5,-9)
NetUSB.J.3_9: USB.J.3.9 USB.Ra.1.7 USB.Ra.1.8 | length 11
  Top Layer w0.2: USB.Ra.1.7@78.95,0.4 cw(c78.95,-1.169) 80.06,-0.06 ; USB.Ra.1.8@78.95,1.2 ccw(c79.312,1.2) 79.056,0.944 80.06,-0.06 ; USB.J.3.9@80.875,-6.575 ccw(c80.875,-5.489) 81.643,-6.257 81.905,-5.995 ccw(c80.891,-4.981) 82.325,-4.981 82.325,-3.282 ccw(c80.016,-3.282) 81.649,-1.649 80.06,-0.06
V_USB: LED.C.20.2 LED.C.21.2 LED.C.23.2 LED.C.24.2 LED.C.25.2 LED.C.26.2 LED.C.27.2 LED.C.28.2 LED.D.1.1 LED.D.2.1 LED.D.3.1 LED.D.4.1 LED.D.5.1 LED.D.6.1 LED.D.7.1 LED.D.8.1 REG.C.12.2 REG.C.16.2 REG.U.3.1 REG.U.3.3 REG.U.4.1 REG.U.4.3 USB.C.19.2 USB.FB.1.2 | length 286.6
  Top Layer w0.5: LED.D.7.1@-10.5,3.3 ccw(c-9.782,4.018) LED.D.7.1@-10.168,3.079
  Top Layer w0.6: v1(-13.8,1.5) -13.352,1.5 ccw(c-13.352,4.04) -11.556,2.244 LED.D.7.1@-10.5,3.3 ; REG.U.3.1@-9.75,-30.65 cw(c-11.194,-30.65) -10.173,-31.671 -10.752,-32.25 ccw(c-8.827,-32.25) -10.188,-33.612 -8.258,-35.542 ccw(c-7.4,-34.685) LED.C.20.2@-7.4,-35.898 -7.4,-32.166 ccw(c-8.766,-32.166) -7.8,-31.2 cw(c-7.679,-31.079) -7.85,-31.079 REG.U.3.3@-7.85,-30.65 ; REG.U.4.3@10.953,-7.913 cw(c11.805,-7.061) 10.6,-7.061 10.6,-4.872 cw(c11.641,-4.872) 10.905,-4.135 11.02,-4.02 cw(c11.6,-4.6) 11.617,-3.78 12.628,-3.78 cw(c12.628,-4.872) v4(13.4,-4.1) ; REG.U.4.1@12.83,-7.619 13.073,-7.376 ccw(c11.342,-5.645) REG.C.16.2@13.79,-5.645
  Top Layer w1: LED.D.7.1@-10.168,3.079 ccw(c-9.984,3.263) -9.984,3.002 -9.785,3.002 ccw(c-9.785,4.002) -9.782,3.002 ccw(c-9.785,4.002) -9.694,3.007 -9.594,3.016 cw(c-9.5,2) -9.487,3.02 LED.C.27.2@-8,3.002 cw(c-8,0.835) -6.468,2.368 -5.839,1.739 ccw(c-4.537,3.042) -4.537,1.2 v4(-0.4,1.2) ; LED.C.20.2@-7.4,-35.898 -5.859,-35.898 cw(c-5.859,-36.759) LED.D.1.1@-5.25,-36.15 cw(c-5.25,-37.839) -4.055,-36.645 -3.2,-37.5 v4(-3.3,-37.5) ; v4(13.4,-4.1) cw(c12.458,-5.042) 13.79,-5.042 REG.C.16.2@13.79,-5.645 19.981,-5.645 cw(c22.673,-7.665) 22.673,-4.3 29.248,-4.3 cw(c29.248,-6.84) 31.044,-5.044 31.6,-5.6 ccw(c33.049,-4.151) 33.049,-6.2 38.648,-6.2 cw(c38.648,-8.74) 40.444,-6.944 v4(43.5,-10) ; LED.C.25.2@35.664,17.174 cw(c34.294,15.804) 36.232,15.804 LED.D.5.1@36.232,15.297 37.897,15.297 v4(37.9,15.3) ; v4(35.9,-32.4) 36.683,-32.4 ccw(c36.683,-30.119) LED.D.3.1@38.296,-31.732 38.454,-31.732 ccw(c38.454,-29.192) 40.25,-30.988 LED.C.23.2@40.274,-30.964 ccw(c41.085,-30.153) 41.085,-31.3 v4(43.652,-31.3)
  Plane 2 w1: v4(43.652,-31.3) cw(c44.135,-31.783) 44.135,-31.1 53.108,-31.1 ccw(c53.108,-29.998) 53.887,-30.777 54.02,-30.644 cw(c55.816,-32.44) 55.816,-29.9 73.934,-29.9 ccw(c73.934,-28.534) 74.9,-29.5 75.256,-29.144 cw(c77.052,-30.94) 77.052,-28.4 v1(82.2,-28.4)
  Bottom Layer w0.5: LED.C.28.2@-12.802,2.6 cw(c-13.532,1.87) -12.5,1.87 LED.D.8.1@-12.5,0.4
  Bottom Layer w0.6: v1(-13.8,1.5) cw(c-13.8,1.017) -13.459,1.359 LED.D.8.1@-12.5,0.4
  Bottom Layer w1: v4(-3.3,-37.5) -0.812,-37.5 -0.112,-36.8 cw(c-0.112,-38.225) 0.896,-37.217 cw(c0.896,-39.405) LED.C.21.2@2.443,-37.858 9.49,-37.858 ccw(c9.49,-35.318) 11.284,-37.116 cw(c19.77,-45.598) 19.77,-33.6 28.855,-33.6 28.858,-33.6 ccw(c28.858,-24.084) 33.181,-32.562 ; v4(-0.4,1.2) 0.456,0.344 ccw(c2.252,2.14) 2.252,-0.4 4.464,-0.4 4.467,-0.4 cw(c4.467,-13.033) v4(13.4,-4.1) ; v4(35.9,-32.4) 33.571,-32.4 ccw(c33.571,-32.952) 33.466,-32.41 ; v4(37.9,15.3) 38.848,15.3 ccw(c38.848,17.84) 40.644,16.044 41.356,16.756 cw(c43.152,14.96) 43.152,17.5 46.334,17.5 cw(c46.334,16.134) 47.3,17.1 47.446,16.954 cw(c46.593,16.1) 47.8,16.1 47.8,16.088 cw(c45.26,16.088) 47.056,14.292 46.686,13.922 ; LED.C.26.2@43.7,12.898 45.564,12.898 46.223,13.556 cw(c48.019,11.76) 46.686,13.922 ; v1(82.2,-28.4) 79.9,-28.4 79.644,-28.656 cw(c77.848,-26.86) 77.848,-29.4 70.449,-29.4 cw(c70.449,-27.351) 69,-28.8 68.527,-28.327 ccw(c66.785,-30.068) LED.C.24.2@66.785,-27.605 64.921,-27.605 cw(c64.921,-27.272) LED.D.4.1@64.685,-27.508 59.859,-22.682 59.856,-22.679 ccw(c55.562,-26.973) 55.562,-20.9 55.559,-20.9 49.981,-20.9 49.978,-20.9 cw(c49.978,-14.86) 45.711,-19.135 45.705,-19.129 cw(c51.24,-13.576) 43.4,-13.576 43.4,-13.573 43.4,-7.763 43.4,-7.76 cw(c68.17,-7.76) 50.657,9.757 52.2,11.3 ccw(c51.476,12.024) 52.5,12.024 52.5,13.034 ccw(c51.134,13.034) 52.1,14 ccw(c51.376,13.276) 51.376,14.3 48.019,14.3 ccw(c48.019,11.76) 46.686,13.922 ; 33.181,-32.562 cw(c33.571,-32.952) 33.466,-32.41 ; 33.181,-32.562 ccw(c28.858,-24.084) 33.466,-32.41
pads on no net: BTN.SW.3. BTN.SW.4. BTN.SW.5. BTN.SW.6. BTN.SW.7. BTN.SW.8. LBS.SW.1. LBS.SW.2. LED.R.18.1 LED.R.19.1 MCH.FID.1.1 MCH.FID.2.1 MCU.U.5.24 MCU.U.5.25 MOS.U.2. MOS.U.2.1 MOS.U.2.2 MOS.U.2.6 MOS.U.2.14 MOS.U.2.16 REG.U.3.4 REG.U.4.4 SCW.D.11. SCW.D.12. USB.J.3. USB.J.3.4 USB.J.3.10 USB.Z.1.6

## Polygon pours and split planes (outlines as drawn)
GND on Top Layer "GND_L01_P020" (solid, remove dead copper, pour order 20): -18,24 -18,-48 90,-48 90,24
3V3 on Top Layer "3V3_L01_P015" (solid, remove dead copper, pour order 15): -9.041,-23.6 cw(c-9.041,-23.941) -8.8,-23.7 -8.671,-23.829 cw(c-8.841,-24) -8.6,-24 -8.6,-27.917 cw(c-9.283,-27.917) -8.8,-28.4 cw(c-9.283,-27.917) -9.283,-28.6 -10.017,-28.6 cw(c-10.017,-27.917) -10.5,-28.4 ccw(c-10.983,-28.883) -10.983,-28.2 -14.017,-28.2 cw(c-14.017,-27.517) -14.5,-28 cw(c-14.017,-27.517) -14.7,-27.517 -14.7,-26.383 cw(c-14.017,-26.383) -14.5,-25.9 cw(c-13.534,-26.866) -13.534,-25.5 -12.583,-25.5 ccw(c-12.583,-24.817) -12.1,-25.3 -12.012,-25.212 ccw(c-12.524,-24.7) -11.8,-24.7 -11.8,-24.283 cw(c-11.117,-24.283) -11.6,-23.8 cw(c-11.117,-24.283) -11.117,-23.6
V_USB on Top Layer "V_USB_L01_P014" (solid, pour order 14): 79.4,-26.6 83,-26.6 cw(c83,-26.841) 83.171,-26.671 83.229,-26.729 cw(c83.059,-26.9) 83.3,-26.9 83.3,-27.534 cw(c81.934,-27.534) 82.9,-28.5 82.641,-28.759 cw(c82.3,-28.417) 82.3,-28.9 79.883,-28.9 cw(c79.883,-28.217) 79.4,-28.7 cw(c79.883,-28.217) 79.2,-28.217 79.2,-26.941 cw(c79.541,-26.941) 79.3,-26.7
3V3 on Plane 2 "3V3_L03_P017" (solid, remove dead copper, pour order 17): 9,-26 4,-31 -13,-31 -15,-29 -15,-20 -14.3,-19.3 -14.3,-9.9 -9.7,-5.3 -1.2,-5.3 9,-15.5 9,-22
GND on Plane 2 "GND_L03_P019" (solid, remove dead copper, pour order 19): -18,24 -18,-48 90,-48 90,24
GND on Plane 1 "GND_L02_P016" (solid, remove dead copper, pour order 16): -18,24 -18,-48 90,-48 90,24
GND on Bottom Layer "GND_L04_P018" (solid, remove dead copper, pour order 18): -18,24 -18,-48 90,-48 90,24

## Keep-outs
Keep-Out Layer:
  region: -15.9,-29.7 cw(c-17,-29.7) -17,-30.8 -17,-23 cw(c-17,-24.1) -15.9,-24.1
  region: -15.9,-2.7 cw(c-17,-2.7) -17,-3.8 -17,4 cw(c-17,2.9) -15.9,2.9

## Silkscreen, mask and mechanical layers (free items; w line width, h text height)
Top Overlay:
  text "BOOTLOADER" at -6.3,-34.177 h1.52
  text "QMKMouse R1.003 / November 2024" at 8.1,-40.1 h2 r15.89
Bottom Overlay:
  text "Licensed under the / CERN-OHL-S v2 / Copyright Ploopy  / 2024" at 2.2,-14.2 h2
Board Outline:
  lines w0.2: -17,-30.803 ccw(c-13,-30.803) -16.307,-33.053 -14.13,-36.252 ccw(c2.405,-25) 7.917,-44.226 38.076,-35.578 cw(c43.589,-54.803) 43.589,-34.803 43.9,-34.8 ccw(c43.9,-33.8) 44.9,-33.8 cw(c45.9,-33.8) 45.9,-32.8 67.8,-32.8 cw(c67.8,-33.8) 68.8,-33.8 ccw(c69.8,-33.8) 69.8,-34.8 80.902,-34.803 ccw(c80.902,-31.803) 83.735,-32.788 ccw(c17.617,-9.803) 87.613,-10.544 ccw(c77.613,-10.438) 87.493,-8.893 86.132,-0.19 86.047,0.208 85.871,0.902 ccw(c85.575,0.85) 85.575,1.15 83.9,1.15 cw(c83.9,1.85) 83.2,1.851 83.2,14.65 83.032,15.112 ccw(c17.617,-9.803) 81.424,18.984 ccw(c78.689,17.75) 78.689,20.75 65.301,20.75 ccw(c65.301,19.75) 64.301,19.75 64.301,19.55 cw(c62.901,19.55) 62.901,18.15 58.101,18.15 cw(c58.101,19.55) 56.701,19.55 56.701,19.75 ccw(c55.701,19.75) 55.701,20.75 47.805,20.75 ccw(c47.805,-29.25) 34.023,18.813 -0.298,8.972 cw(c-5.811,28.197) -5.811,8.197 -13,8.197 ccw(c-13,4.197) -17,4.197 -17,-30.803 ; 45.689,-10.818 cw(c48.653,-10.355) 48.189,-7.391 70.913,-3.838 cw(c71.377,-6.801) 74.341,-6.338 75.113,-11.278 cw(c72.149,-11.741) 72.612,-14.705 49.889,-18.259 cw(c49.425,-15.295) 46.461,-15.758 45.689,-10.818
Assembly Top:
  circle w0.1: c50.004,-28.058 r2.6
  circle w0.1: c9.132,3.562 r2.6

## Text inside footprints (layer, text, board x,y; h text height)
MCH.LOGO.2: Top Overlay "Y" at 0.599,3.1 h2.4; Top Overlay "X" at 3,0.6 h2.4
MOS.U.2: Top Overlay "1" at 32.424,-13.583 h4 r8.89; Top Overlay "Sensor Side" at 14.971,-22.689 h2 r98.89; Bottom Overlay "Optic Side" at 13.24,-14.533 h2 r98.89